# Altium PCB Fuel gauge.PcbDoc
Units mm, origin at the board's own origin, x right, y up, seen from the top; angles counter-clockwise.
Board outline 17.78 x 31.75 mm, 2 copper layers (Top Layer, Bottom Layer); 9 components, 8 nets, 39 pads, 55 vias.
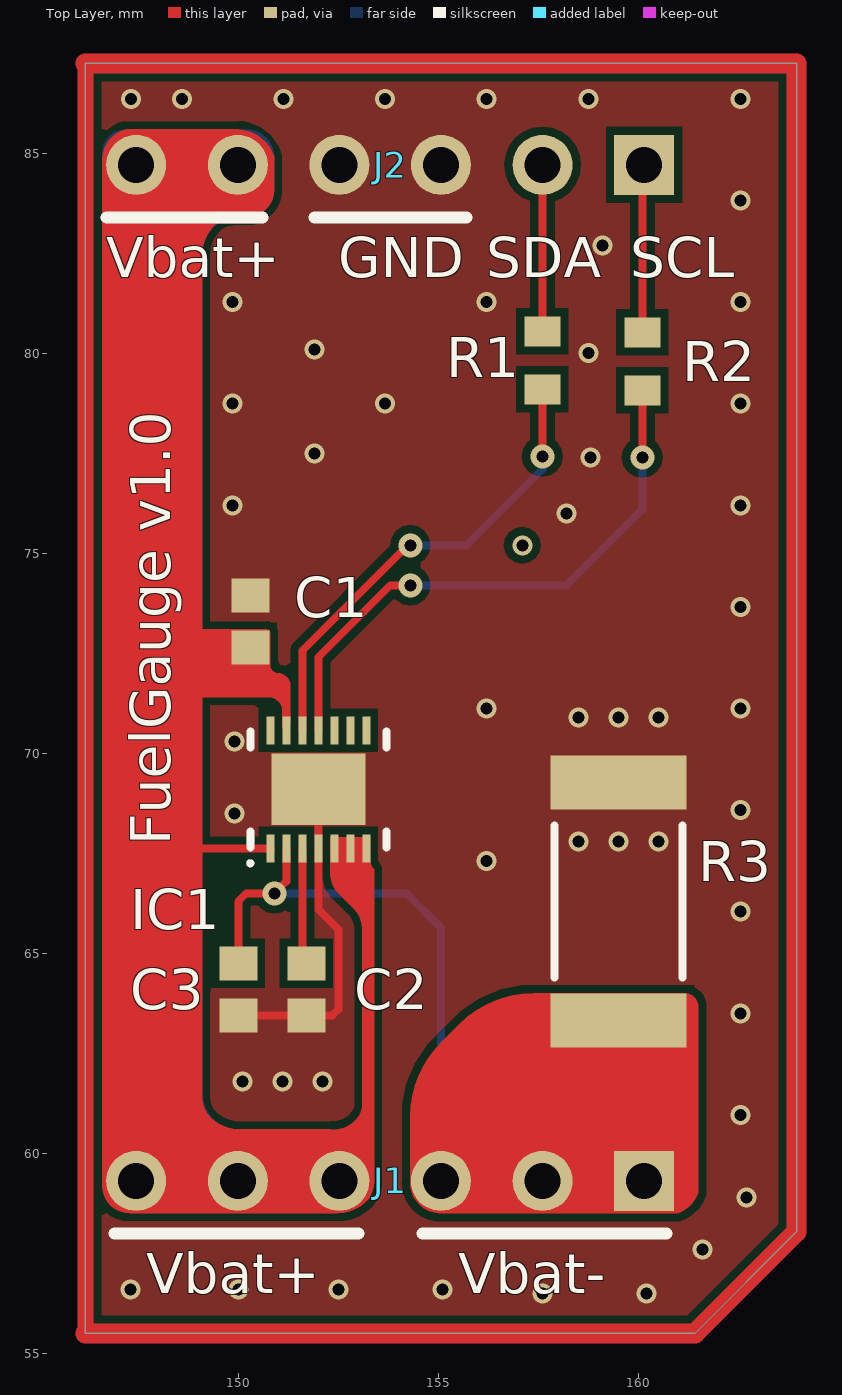
[diagram p0: Top Layer view]
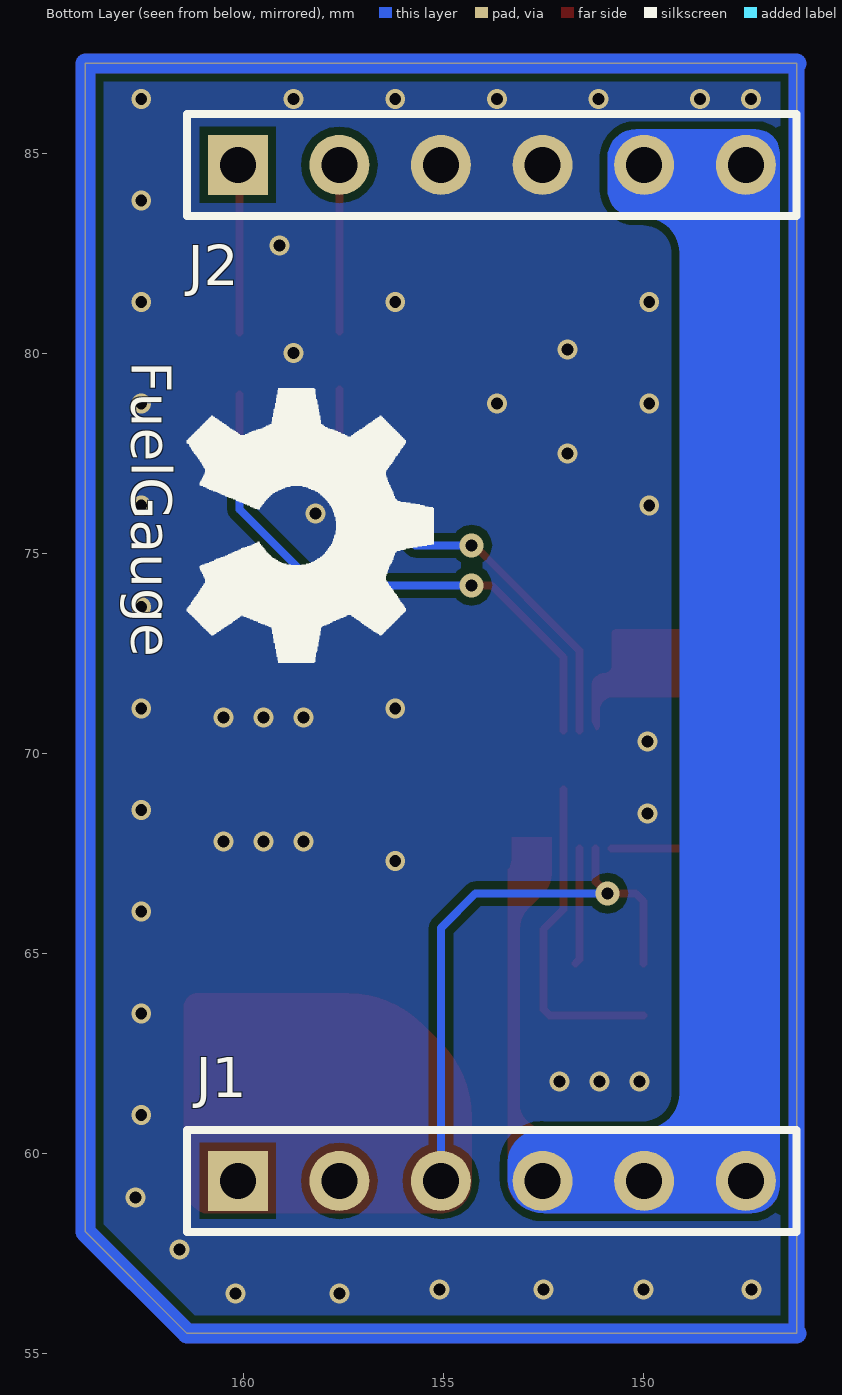
[diagram p1: Bottom Layer view, seen from below]
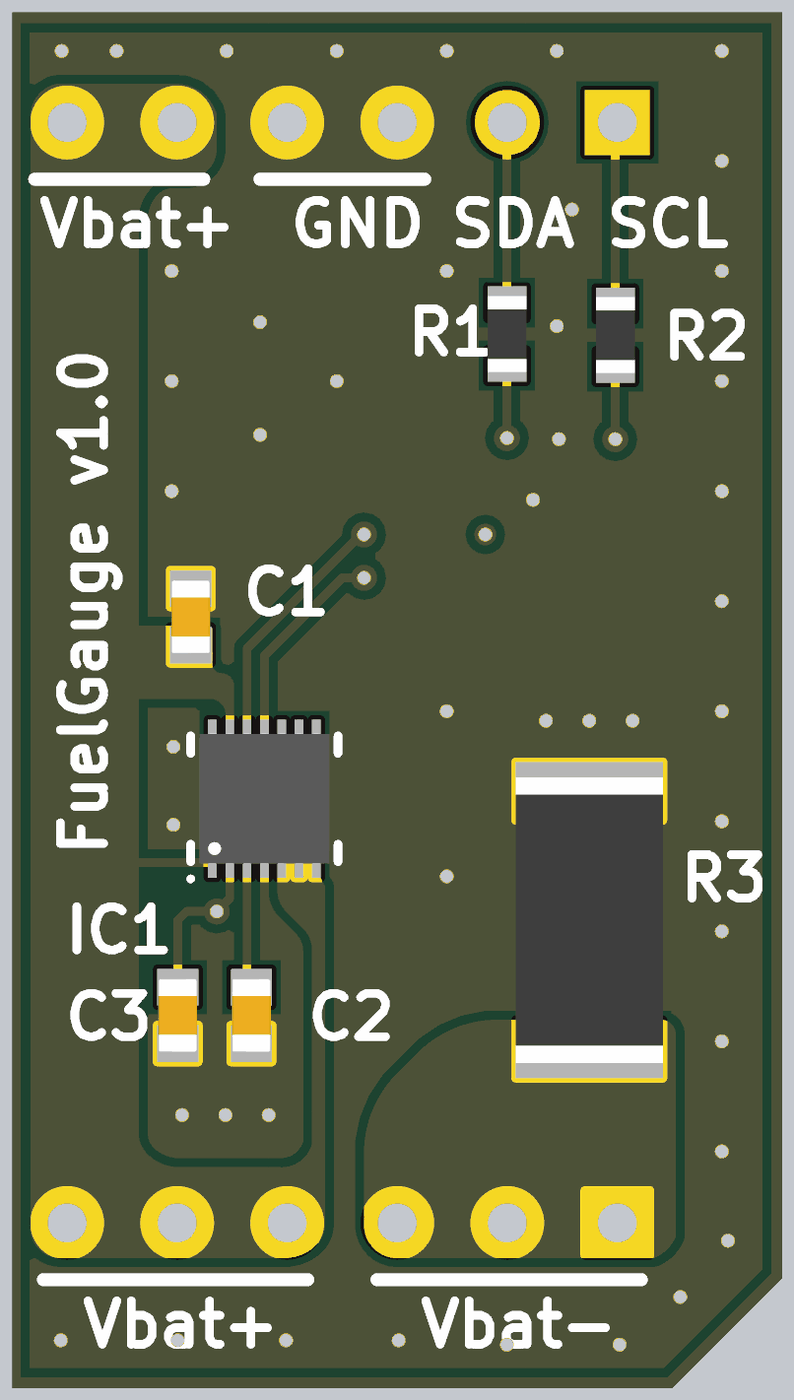
[diagram p2: 3D render of the assembled board from above, using the file's embedded part models]

## Layer stack, top to bottom
Top Solder: solder mask 0.0102, Solder Resist, Dk 3.5
Top Layer: signal copper 0.0356
Dielectric 1: dielectric 0.32, FR-4, Dk 4.8
Bottom Layer: signal copper 0.0356
Bottom Solder: solder mask 0.0102, Solder Resist, Dk 3.5

## Board outline
146.177,55.499 146.177,87.249 163.957,87.249 163.957,58.039 161.417,55.499

## Design rules (kind name [scope] priority, off if disabled: settings)
Clearance [All] p1: gap=0.2 ignorepadtopadclearanceinfootprint=FALSE
PlaneConnect [All] p1: planeconnectstyle=Direct reliefexpansion=0.508 reliefentries=4 reliefconductorwidth=0.254 reliefairgap=0.254
PolygonConnect [All] p1: connectstyle=Direct reliefconductorwidth=0.254 reliefentries=4 polygonreliefangle="90 Angle" airgapwidth=0.254
RoutingVias [All] p1: holewidth=0.3 width=0.6 viastyle="Through Hole" minholewidth=0.3 minwidth=0.5 maxholewidth=1.5 maxwidth=2
SolderMaskExpansion [All] p1: expansion=0.102
Width [All] p1: maxlimit=2 minlimit=0.2 preferedwidth=0.5
29 further rules are at their usual default settings.

## Components (designator, comment, footprint, x,y, rotation, side; value= is the part's Value field where it differs from the comment)
C1 "Capacitor NP" "0603 cap" 150.3,73.3 r270 top
C2 "Capacitor NP" "0603 cap" 151.7,64.1 r90 top
C3 "Capacitor NP" "0603 cap" 150,64.1 r90 top
IC1 "MAX17201" TDFN14 152,69.1 r90 top
J1 "Fuel Gauge IN" HDR1X6 160.147,59.309 r180 top
J2 "Fuel Gauge OUT" HDR1X6 160.147,84.709 r180 top
R1 "Resistor generic" "0603 RES" 157.6,79.825 r90 top
R2 "Resistor generic" "0603 RES" 160.1,79.8 r90 top
R3 "Resistor generic" "2512 RES" 159.5,66.3 r90 top

## Footprints (in the part's own frame and the unit in brackets; to place one, negate y for a bottom-side part, rotate by r counter-clockwise, add the part's x,y. Pads: shape width x height; smd on the part's side, far side on the other; paste and mask are expansions set on the pad)
"0603 cap" [mm]
  rect 0.85x0.95 smd: 1(-0.65,0) 2(0.65,0)
  body extent -0.85,-0.45 0.85,0.45, height 0.8
"0603 RES" [mm] "RES0603 medium"
  rect 0.75x0.9 smd: 1(-0.725,0) 2(0.725,0)
  body extent -0.87,-0.45 0.87,0.45, height 0.4
"2512 RES" [mm] "2512 RES med"
  rect 1.35x3.4 smd: 1(-2.975,0) 2(2.975,0)
  silkscreen extent -1.9,-1.6 1.9,1.6, body extent -3.3,-1.7 3.3,1.7, height 0.6
HDR1X6 [mm] "Connector; Header; 6 Position"
  rect 1.5x1.5 hole 0.9: 1(0,0)
  round 1.5 hole 0.9: 2(2.54,0) 3(5.08,0) 4(7.62,0) 5(10.16,0) 6(12.7,0)
TDFN14 [mm] "MAX17201 TDFN"
  rect 0.7x0.2 smd: 1(-1.475,1.2) 2(-1.475,0.8) 3(-1.475,0.4) 4(-1.475,0) 5(-1.475,-0.4) 6(-1.475,-0.8) 7(-1.475,-1.2) 8(1.475,-1.2) 9(1.475,-0.8) 10(1.475,-0.4) 11(1.475,0) 12(1.475,0.4) 13(1.475,0.8) 14(1.475,1.2)
  rect 1.78x2.35 smd: 15(0,0)
  silkscreen extent -1.9,-1.7 1.45,1.75, body extent -1.51,-1.5 1.5,1.5, height 0.73

## Part data
IC1: "Single cell fuel gauge", Supplier 1="Avnet Europe"
J1 J2: library part "Header 6", "Header, 6-Pin", LatestRevisionDate=17-Jul-2002, LatestRevisionNote="Re-released for DXP Platform.", Publisher="Altium Limited"
R1 R2 R3: library part Resistor, "Resistor SMD"
  R1 R2: Valve=150R
  R3: Valve=0.01R
C1 C2: Valve=1uF
C3: Valve=10nF

## Via types
v1: diameter 0.5, hole 0.3, Top Layer to Bottom Layer, tented both sides, 50 vias
v2: diameter 0.6, hole 0.3, Top Layer to Bottom Layer, tented both sides, 5 vias

## Nets (pads, with @x,y where several pads share a name; then routed paths per layer and width w, separated by ;. In a path a pad name is that pad's centre, name@x,y a point inside that pad or via, vN(x,y) a via of type N, cw(c..) or ccw(c..) an arc to the next point about the centre after c; other vN are vias at no path point)
+BAT: C1.2 IC1.1 IC1.5 IC1.6 IC1.7 IC1.13 J1.4 J1.5 J1.6 J2.5 J2.6 | length 2.8
  Top Layer w0.2: 148,67.6 cw(c148.06,67.54) 148.06,67.625 IC1.1
-BAT: C3.2 IC1.2 J1.1 J1.2 J1.3 R3.1 | length 14.6
  Top Layer w0.2: C3.2 150,66.3 150.2,66.5 v2(150.9,66.5) 151.2,66.8 IC1.2
  Bottom Layer w0.2: v2(150.9,66.5) 154.2,66.5 155.067,65.633 J1.3
GND: C1.1 C2.1 C3.1 IC1.4 IC1.15 J2.3 J2.4 R3.2 | length 8.3
  Top Layer w0.2: C3.1 C2.1 152.35,63.45 152.5,63.6 152.5,65.6 152,66.1 IC1.4 IC1.15
  other v1: 157.6,56.5 160.2,56.5 147.3,56.6 150,56.6 152.5,56.6 155.1,56.6 161.6,57.6 162.7,58.9 162.56,60.96 150.1,61.8 151.1,61.8 152.1,61.8 162.56,63.5 162.56,66.04 156.21,67.31 158.5,67.8 159.5,67.8 160.5,67.8 149.9,68.5 162.56,68.58 149.9,70.3 158.5,70.9 159.5,70.9 160.5,70.9 156.21,71.12 162.56,71.12 162.56,73.66 158.2,76 149.86,76.2 162.56,76.2 158.8,77.4 151.9,77.5 149.86,78.74 153.67,78.74 162.56,78.74 158.75,80.01 151.9,80.1 149.86,81.28 156.21,81.28 162.56,81.28 159.1,82.7 162.56,83.82 147.32,86.36 148.59,86.36 151.13,86.36 153.67,86.36 156.21,86.36 158.75,86.36 162.56,86.36
NetC2_2: C2.2 IC1.3 | length 2.9
  Top Layer w0.2: IC1.3 151.6,64.85 C2.2
NetIC1_11: IC1.11 R2.1 | length 14.3
  Top Layer w0.2: IC1.11 152,72.4 153.8,74.2 v2(154.3,74.2) ; v2(160.1,77.4) R2.1@160.1,78.975
  Bottom Layer w0.2: v2(154.3,74.2) 158.2,74.2 160.1,76.1 v2(160.1,77.4)
NetIC1_12: IC1.12 R1.1 | length 11.9
  Top Layer w0.2: IC1.12 151.6,72.566 154.234,75.2 v2(154.3,75.2) ; v2(157.6,77.425) R1.1
  Bottom Layer w0.2: v2(154.3,75.2) 155.7,75.2 157.6,77.1 v2(157.6,77.425)
NetJ2_1: J2.1 R2.2 | length 4.2
  Top Layer w0.2: R2.2 160.1,84.662 cw(c160.147,84.662) J2.1
NetJ2_2: J2.2 R1.2 | length 4.2
  Top Layer w0.2: R1.2 157.6,84.709 J2.2
pads on no net: IC1.8 IC1.9 IC1.10 IC1.14
copper on no net:
  other v1: 157.1,75.2

## Polygon pours and split planes (outlines as drawn)
GND on Top Layer "GND" (solid, remove dead copper, pour order 0): 146.177,55.499 146.177,87.249 163.957,87.249 163.957,58.039 161.417,55.499
GND on Bottom Layer "GND" (solid, remove dead copper, pour order 1): 146.177,55.499 146.177,87.249 163.957,87.249 163.957,58.039 161.417,55.499

## Other copper
Top Layer:
  region net +BAT: 151.3,70.8 151.3,71.7 ccw(c151,71.7) 151,72 cw(c151,72.2) 150.8,72.2 150.8,73 ccw(c150.7,73) 150.7,73.1 148.8,73.1 ccw(c148.8,73) 148.7,73 148.7,71.6 ccw(c148.9,71.6) 148.9,71.4 150.8,71.4 cw(c150.75,71.05) 151.1,71 151.1,70.675 ccw(c151.2,70.675) 151.2,70.575
  region net +BAT: 147.2,85.6 ccw(c147.358,84.859) 146.6,84.859 146.6,59.183 ccw(c147.283,59.183) 146.8,58.7 ccw(c147.283,59.183) 147.283,58.5 152.476,58.5 ccw(c152.476,59.524) 153.2,58.8 ccw(c152.717,59.283) 153.4,59.283 153.4,67.1 cw(c153.641,67.341) 153.3,67.341 153.3,67.9 152.3,67.9 152.3,66.983 ccw(c152.983,66.983) 152.5,66.5 152.888,66.112 cw(c152.376,65.6) 153.1,65.6 153.1,61.141 cw(c152.391,61.328) 152.3,60.6 cw(c152.288,60.629) 152.276,60.6 150.024,60.6 cw(c150.024,61.624) 149.3,60.9 cw(c149.783,61.383) 149.1,61.383 149.1,82.476 cw(c150.124,82.476) 149.4,83.2 cw(c149.883,82.717) 149.883,83.4 150.2,83.4 ccw(c150.2,84.1) 150.9,84.1 150.9,84.9 ccw(c149.966,84.627) 150,85.6
  region net -BAT: 154.3,60.927 cw(c156.891,60.927) 155.059,62.759 155.541,63.241 cw(c157.373,61.409) 157.373,64 161.159,64 cw(c161.159,63.659) 161.4,63.9 cw(c161.159,63.659) 161.5,63.659 161.5,59 cw(c160.647,59.353) 161,58.5 155,58.5 cw(c155.063,59.262) 154.3,59.3
Bottom Layer:
  region net +BAT: 152.5,58.5 147.3,58.5 cw(c147.3,59.2) 146.6,59.2 146.6,85 cw(c147.2,85) 147.2,85.6 150.2,85.6 cw(c150.2,84.9) 150.9,84.9 150.9,84.1 cw(c150.2,84.1) 150.2,83.4 150,83.4 ccw(c150,82.5) 149.1,82.5 149.1,61.5 ccw(c150,61.5) 150,60.6 152.5,60.6 cw(c152.55,59.75) 153.4,59.8 153.4,59.3 cw(c152.5,59.406)
Multi-Layer:
  the board outline again, w0.5

## Silkscreen, mask and mechanical layers (free items; w line width, h text height)
Top Overlay:
  lines w0.3: 146.7,83.4 150.6,83.4 ; 146.9,58 153,58 ; 151.9,83.4 155.7,83.4 ; 154.6,58 160.7,58
  text "Vbat+" at 146.7,81.9 h1
  text "GND" at 152.5,81.9 h1
  text "SDA" at 156.2,81.9 h1
  text "SCL" at 159.8,81.9 h1
  text "FuelGauge v1.0" at 148.3,67.7 h1 r90
  text "Vbat+" at 147.7,56.5 h1
  text "Vbat-" at 155.5,56.5 h1
Bottom Overlay:
  region: 1925 vertices and 0 holes, not listed, extent 155.251,72.268 161.416,79.133
  text "FuelGauge" at 162.8,79.8 h1 r90
  text "Vbat+" at 157.2,23 h1